# Altium PCB PCB1.PcbDoc (part 3 of 4)
Units mil, origin at the board's own origin, x right, y up, seen from the top; angles counter-clockwise.
Board outline 2700 x 1000 mil, 4 copper layers (L1, L2, L3, L4), stack 61.583 mil thick; 64 components, 75 nets, 299 pads, 161 vias.
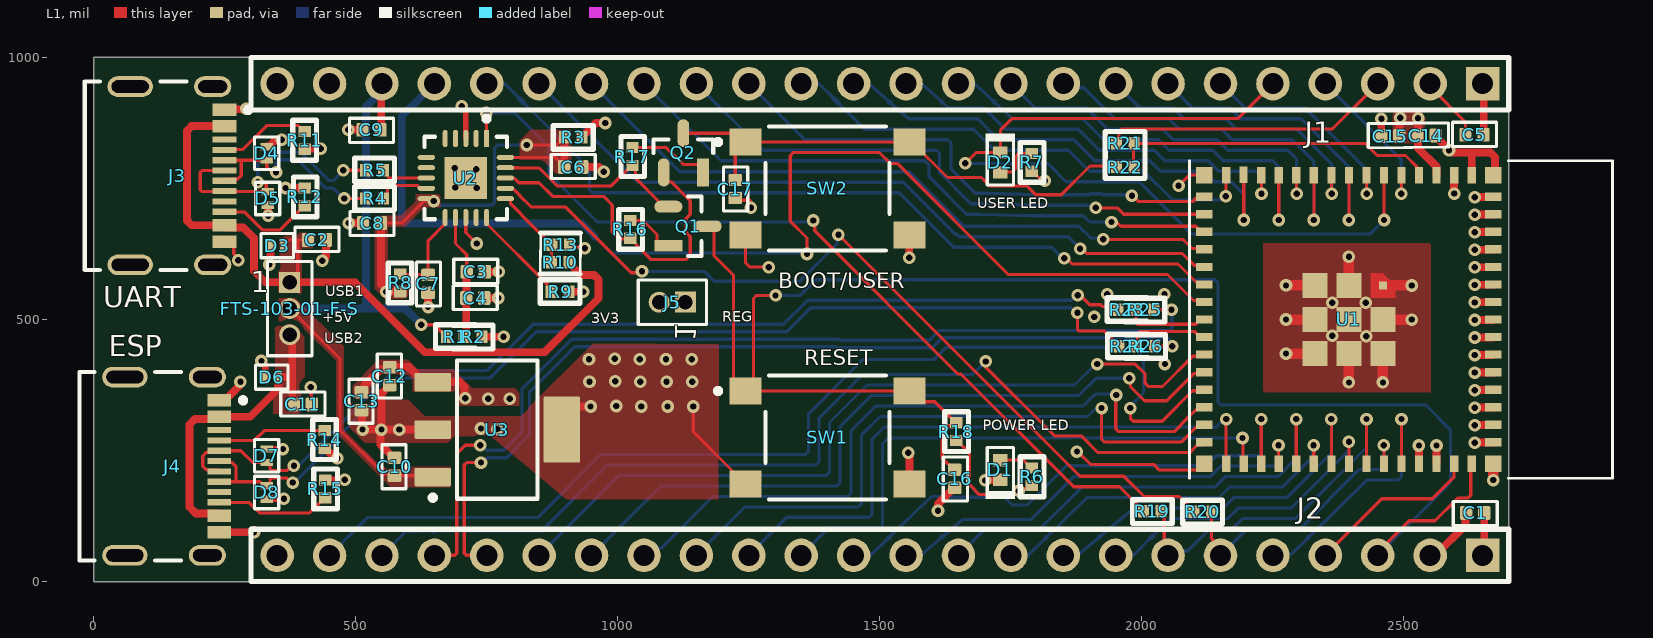
[diagram p0: L1 view]

## Via types
v1: diameter 24, hole 12, L1 to L4, tented both sides, 161 vias

## Nets (pads, with @x,y where several pads share a name; then routed paths per layer and width w, separated by ;. In a path a pad name is that pad's centre, name@x,y a point inside that pad or via, vN(x,y) a via of type N, cw(c..) or ccw(c..) an arc to the next point about the centre after c; other vN are vias at no path point) (continued)
-VCC_FTDI: (continued)
  L1 w6: U2.12@690.32,694.59 690.32,665 690.32,644.97 711.8,623.49 C3.2@711.8,591
  L1 w15: R1.2@707.02,467 706.99,468.18 710.8,471.98 C4.2@710.8,541 711.3,541.5 711.3,590.5 C3.2@711.8,591
BTN_GPIO0: C17.2 Q2.3 R22.1 SW2.1 SW2.2 | length 976.2
  L1 w6: Q2.3@1125,855.42 1226.66,855.42 SW2.1@1243.5,838.58 ; C17.2@1224,766.2 1224,819.08 SW2.1@1243.5,838.58 ; R22.1@1948.98,793 1901.09,793 1846.09,738 1797.61,738 1781.13,754.49 1710.01,754.49 1701.22,763.27 1701.22,763.78 1694,771 1629,771 1561.42,838.58 SW2.2@1556.5,838.58 SW2.1@1243.5,838.58
CHIP_PU: C16.2 J2.3 Q1.3 R18.1 SW1.1 SW1.2 U1.45 | length 3259.2
  L1 w6: Q1.3@1171.42,678 1177.7,678 1183.49,672.21 1183.49,621.51 1221,584 1221,384.17 1241.59,363.58 SW1.1@1243.5,363.58 ; v1(1301,546) 1264.86,546 1259,540.14 1259,379.08 SW1.1@1243.5,363.58 ; C16.2@1643,213.2 1641.62,213.2 1619.19,235.64 1619.19,285.84 1630.73,297.38 1640.37,297.38 R18.1@1646,303.01 1644.82,303.01 1604.83,342.99 1577.09,342.99 SW1.2@1556.5,363.58 SW1.1@1243.5,363.58 ; J2.3@2450,50 2450,56 2510,116 2559.31,116 2602.5,159.19 2621.57,159.19 2627.43,165.05 2627.43,222.55 U1.45@2629.29,224.41
  L4 w6: v1(1301,546) 1348.47,546 1378.47,576 2139.14,576 2145,570.14 2145,342.9 2150.86,337.04 2541.07,337.04 2589.11,288.99 2589.11,189.11 J2.3@2450,50
CON1_USB_N: D4.2 J3.A7 J3.B7 R4.1 | length 405.4
  L1 w6.23: J3.A7@249.68,764.65 252.48,767.44 274.22,767.44 281.44,774.65 281.44,801.67 279,804.11 ; J3.B7@249.68,804.02 249.78,804.11 279,804.11 ; v1(348,781) 344.6,784.4 336.6,784.4 330,791 D4.2@330,804.2 329.91,804.11 279,804.11 ; v1(478,731) R4.1@518.99,731
  L4 w6.23: v1(348,781) 348,801.18 351.65,804.83 389.22,804.83 443.16,750.89 457.11,750.89 477,731 v1(478,731)
CON1_USB_P: D5.2 J3.A6 J3.B6 R5.1 | length 527.5
  L1 w6.23: J3.A6@249.68,784.33 206.98,784.33 203.33,780.68 203.33,747.74 206.98,744.09 248.81,744.09 J3.B6@249.68,744.96 250.27,744.38 331.42,744.38 D5.2@332,743.8 329,746.8 329,758.24 325.24,762 v1(313,762) ; v1(476,785) R5.1@518.99,785
  L4 w6.23: v1(313,762) 313,798.9 333.16,819.06 395.11,819.06 449.06,765.11 457.11,765.11 476,784 v1(476,785)
CON2_USB_N: D7.2 J4.A7 J4.B7 R23.1 | length 1974
  L1 w6.03: D7.2@332.43,227.2 336.2,223.43 336.2,215.76 339.85,212.11 357.36,212.11 357.41,212.06 369.47,212.06 378.41,221 v1(382,221)
  L1 w6.23: J4.A7@239.57,210.24 236.78,213.03 215.03,213.03 207.81,220.24 207.81,239.6 215.03,246.82 236.78,246.82 J4.B7@239.57,249.61 280.88,249.61 303.29,227.2 D7.2@330,227.2 ; v1(1877.67,546.51) 1882.48,546.51 1900.88,528.11 1913.31,528.11 1913.43,528 1921.31,528 1924.43,524.89 1948.29,524.89 R23.1@1954.66,518.51
  L4 w6.23: v1(382,221) 385.4,224.4 394.59,224.4 440.66,270.47 572.99,402.81 750.5,402.81 838.49,490.81 1316.06,490.81 1362.13,536.87 1865.14,536.87 1874.78,546.51 v1(1877.67,546.51)
CON2_USB_P: D8.2 J4.A6 J4.B6 R24.1 | length 1985.3
  L1 w6.03: D8.2@336.2,186.57 336.2,194.24 339.85,197.89 351.46,197.89 351.52,197.83 367.47,197.83 376.42,188.89 v1(380.01,188.89)
  L1 w6.23: J4.B6@239.57,190.55 317.32,190.55 325.08,182.8 D8.2@330,182.8 ; J4.A6@239.57,229.92 242.36,227.13 264.11,227.13 271.32,219.92 271.32,192 ; D8.2@332.43,182.8 D8.2@336.2,186.57 ; v1(1877,513) 1877,481.65 1880.65,478 1928.17,478 1955.99,450.18 R24.1@1955.99,449
  L4 w6.23: v1(380.01,188.89) 382.57,188.89 454.89,261.2 454.89,264.57 578.89,388.58 756.39,388.58 844.39,476.58 1321.96,476.58 1368.02,522.64 1864.47,522.64 1874.11,513 v1(1877,513)